# Altium PCB SC8808_V4.PcbDoc (part 2 of 2)
Units mm, origin at the board's own origin, x right, y up, seen from the top; angles counter-clockwise.
Board outline 67.41 x 100 mm, 4 copper layers (Top Layer, SIGNAL, POWER, Bottom Layer), stack 1.439 mm thick; 136 components, 98 nets, 352 pads, 959 vias.
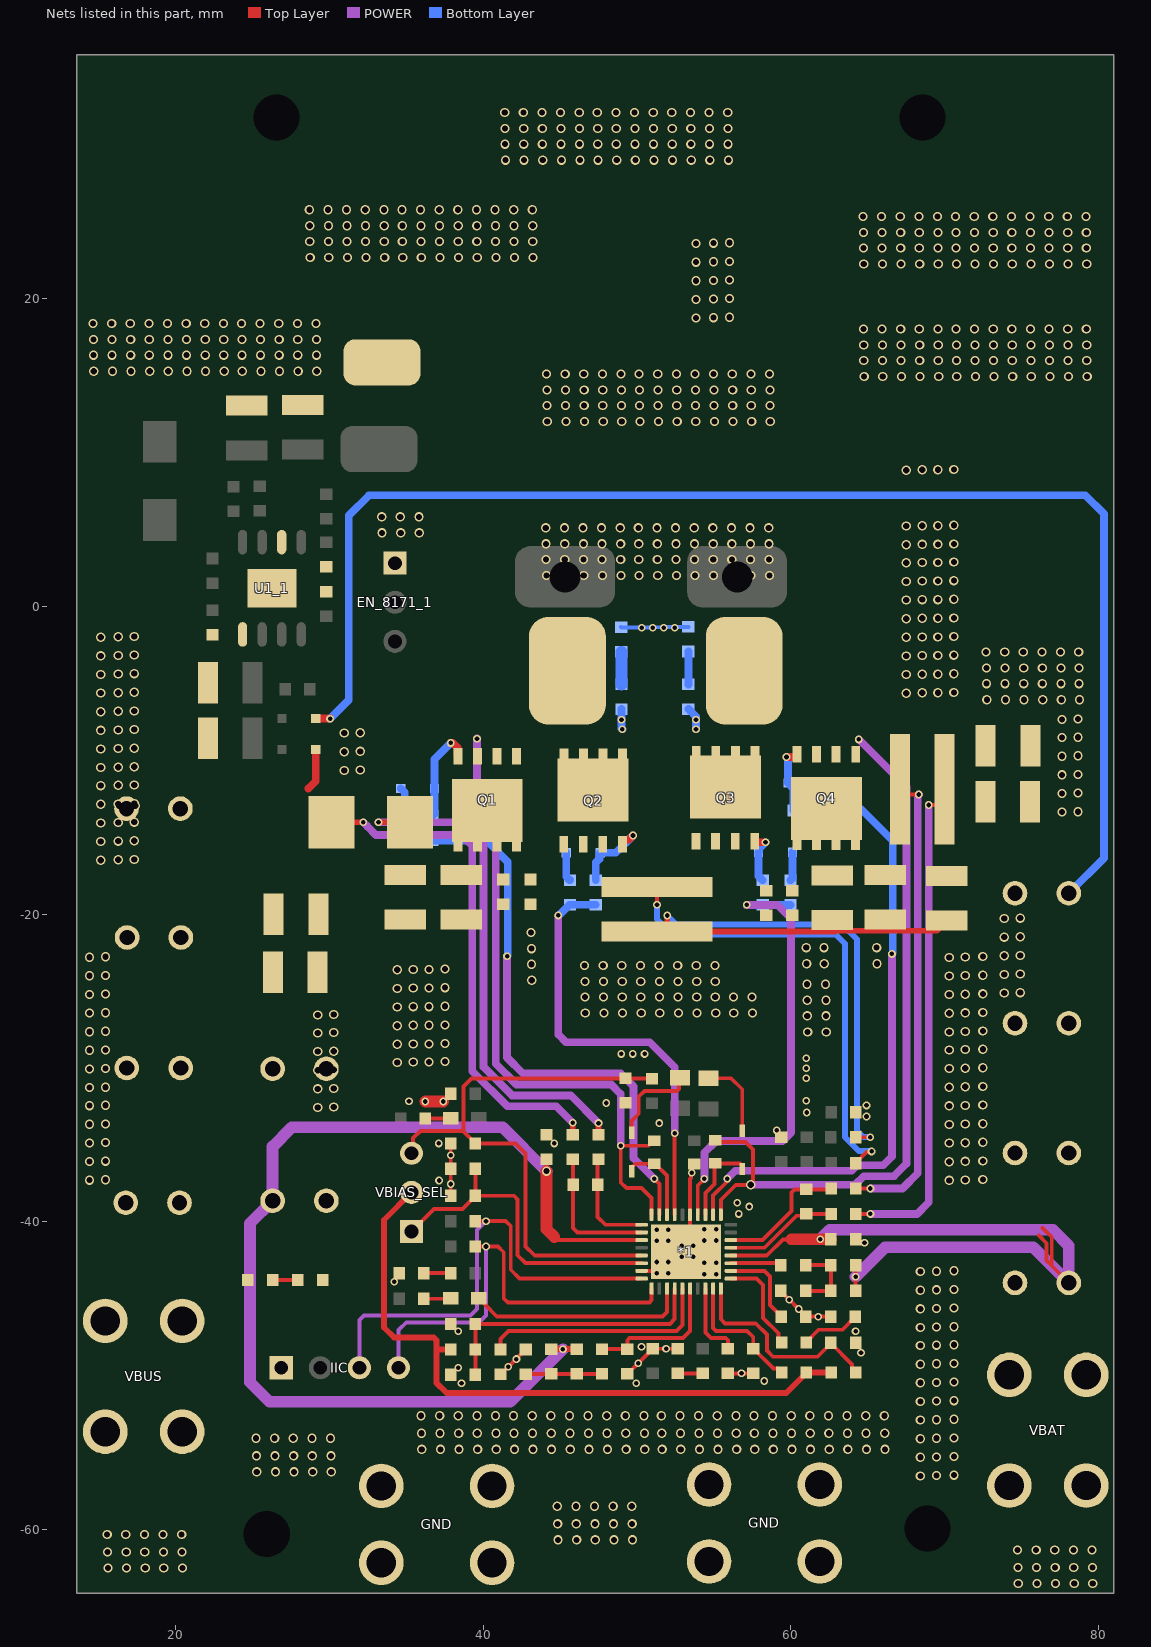
[diagram p4: the nets of this part, all layers, seen from the top]

## Via types
v1: diameter 0.6, hole 0.4, Top Layer to Bottom Layer, 853 vias
v2: diameter 0.5, hole 0.3, Top Layer to Bottom Layer, 106 vias

## Nets (pads, with @x,y where several pads share a name; then routed paths per layer and width w, separated by ;. In a path a pad name is that pad's centre, name@x,y a point inside that pad or via, vN(x,y) a via of type N, cw(c..) or ccw(c..) an arc to the next point about the centre after c; other vN are vias at no path point) (continued)
GND: *1.23 *1.35 *1.37 C1.2 C4.1 C5.2 C6.2 C7.1 C8.2 C9.2 C10.2 C11.2 C12.1 C13.1 C14.1 C15.1 C16.1 C17.2 C18.1 C19.2 C20.1 C27.1 C28.1 C29.2 C43.1 C44.1 C45.2 C46.2 C53.1 C60.2 C71.1 C72.1 C73.2 C75.1 C77.1 C78.2 C79.1 C80.2 C81.1 C82.1 C84.2 C85.1 C86_2.1 C88_1.1 C89_1.1 C90_1.1 C91_1.1 C92.1 EN_8171_1.1 GND.1 IIC.1 pad.2@33.426,15.875 R9.1 R10.1 R13.1 R14.2 R18.2 R23.1 R33_1.1 R35.1 R38.2 R41.1 R45.1 R51.2 R53.2 R54_1.1 U1_1.1 U1_1.6 U1_1.9 | length 75.1
  Top Layer w0.254: C78.2@37.885,-34.9 37.891,-34.906 v2(37.891,-35.662) v2(37.891,-37.541) 37.891,-38.297 C92.1@37.897,-38.303 ; C79.1@41.123,-49.898 41.148,-49.898 v2(41.623,-49.423) 41.642,-49.423 42.145,-48.92 v2(42.164,-48.92) ; v2@42.145,-48.901 42.499,-48.546 42.526,-48.546 R9.1@42.774,-48.298 ; C19.2@49.378,-49.873 49.403,-49.873 v2(50.079,-49.196) 50.756,-48.52 50.756,-48.495 51.004,-48.247 C4.1@51.029,-48.247 v2(51.892,-48.247) R53.2@52.654,-48.247 ; *1.35@50.302,-43.186 51.123,-43.186 v2(51.283,-43.345) ; v2(53.67,-41.542) 53.452,-41.324 *1.23@53.452,-39.536 53.452,-37.207 53.522,-37.138 53.522,-36.852 v2(53.569,-36.805) 53.569,-36.367 C80.2@53.702,-36.233 ; C82.1@55.905,-49.847 v2(56.794,-49.847) R13.1@57.556,-49.847 ; R18.2@59.36,-44.488 59.36,-44.513 59.893,-45.046 v2(59.893,-45.06) 59.9,-45.06 60.504,-45.664 v2(60.511,-45.664) 60.737,-45.891 60.737,-45.916 C81.1@60.985,-46.164 v2(61.786,-46.164) R51.2@62.586,-46.164 ; R14.2@64.211,-34.506 64.216,-34.501 v2(65.171,-34.501)
  Top Layer w0.381: R10.1@51.3,-21.118 R10.1@51.661,-21.118 ; v2(51.968,-20.084) 51.968,-20.811 R10.1@51.661,-21.118 ; C53.1@70.146,-20.413 69.486,-21.073 62.947,-21.073 62.902,-21.118 R10.1@51.661,-21.118
  Top Layer w0.762: v2(36.246,-32.174) v2(37.414,-32.174)
  Bottom Layer w0.254: C85.1@48.971,-1.33 48.992,-1.351 50.297,-1.351 v2(50.317,-1.372) 50.33,-1.359 51.016,-1.359 51.029,-1.346 51.74,-1.346 51.752,-1.333 52.438,-1.333 52.451,-1.321 C71.1@53.34,-1.321
  Bottom Layer w0.381: v2(51.968,-20.084) 52.56,-20.676 63.348,-20.676 64.299,-21.627 64.299,-34.056 64.72,-34.478 65.148,-34.478 v2(65.171,-34.501)
  other v1: 74.79,-63.517 76.001,-63.517 77.212,-63.517 78.423,-63.517 79.634,-63.517 15.608,-62.501 16.819,-62.501 18.03,-62.501 19.241,-62.501 20.452,-62.501 74.765,-62.476 75.976,-62.476 77.186,-62.476 78.397,-62.476 79.608,-62.476 15.583,-61.46 16.794,-61.46 18.004,-61.46 19.215,-61.46 20.426,-61.46 74.739,-61.333 75.95,-61.333 77.161,-61.333 78.372,-61.333 79.583,-61.333 44.869,-60.672 46.08,-60.672 47.291,-60.672 48.502,-60.672 49.713,-60.672 15.557,-60.317 16.768,-60.317 17.979,-60.317 19.19,-60.317 20.401,-60.317 44.843,-59.631 46.054,-59.631 47.265,-59.631 48.476,-59.631 49.687,-59.631 44.818,-58.488 46.029,-58.488 47.24,-58.488 48.451,-58.488 49.662,-58.488 68.422,-56.518 69.464,-56.493 70.607,-56.468 25.285,-56.253 26.496,-56.253 27.707,-56.253 28.918,-56.253 30.129,-56.253 68.422,-55.307 69.464,-55.282 70.607,-55.257 25.26,-55.211 26.471,-55.211 27.682,-55.211 28.893,-55.211 30.104,-55.211 36.011,-54.788 37.222,-54.788 38.433,-54.788 39.644,-54.788 40.855,-54.788 42.03,-54.788 43.241,-54.788 44.452,-54.788 45.663,-54.788 46.874,-54.788 48.085,-54.788 49.296,-54.788 50.507,-54.788 51.636,-54.788 52.847,-54.788 54.058,-54.788 55.269,-54.788 56.48,-54.788 57.655,-54.788 58.866,-54.788 60.077,-54.788 61.288,-54.788 62.499,-54.788 63.71,-54.788 64.921,-54.788 66.132,-54.788 68.422,-54.096 25.235,-54.068 26.446,-54.068 27.656,-54.068 28.867,-54.068 30.078,-54.068 69.464,-54.071 70.607,-54.046 35.986,-53.746 37.197,-53.746 38.408,-53.746 39.619,-53.746 40.829,-53.746 42.005,-53.746 43.216,-53.746 44.427,-53.746 45.638,-53.746 46.849,-53.746 48.06,-53.746 49.271,-53.746 50.481,-53.746 51.611,-53.746 52.822,-53.746 54.033,-53.746 55.244,-53.746 56.455,-53.746 57.63,-53.746 58.841,-53.746 60.052,-53.746 61.263,-53.746 62.474,-53.746 63.685,-53.746 64.896,-53.746 66.107,-53.746 68.422,-52.886 69.464,-52.86 70.607,-52.835 35.96,-52.603 37.171,-52.603 38.382,-52.603 39.593,-52.603 40.804,-52.603 41.98,-52.603 43.19,-52.603 44.401,-52.603 45.612,-52.603 46.823,-52.603 48.034,-52.603 49.245,-52.603 50.456,-52.603 51.585,-52.603 52.796,-52.603 54.007,-52.603 55.218,-52.603 56.429,-52.603 57.605,-52.603 58.816,-52.603 60.027,-52.603 61.237,-52.603 62.448,-52.603 63.659,-52.603 64.87,-52.603 66.081,-52.603 68.422,-51.675 69.464,-51.649 70.607,-51.624 68.422,-50.464 69.464,-50.438 70.607,-50.413 68.422,-49.253 69.464,-49.227 70.607,-49.202 68.422,-48.042 69.464,-48.016 70.607,-47.991 68.422,-46.866 69.464,-46.841 70.607,-46.816 68.422,-45.655 69.464,-45.63 70.607,-45.605 68.422,-44.444 69.464,-44.419 70.607,-44.394 68.422,-43.234 69.464,-43.208 70.607,-43.183 70.302,-37.301 14.402,-37.29 71.343,-37.276 15.443,-37.264 72.486,-37.25 70.302,-36.09 14.402,-36.079 71.343,-36.065 15.443,-36.053 72.486,-36.039 14.402,-34.868 70.302,-34.879 15.443,-34.842 71.343,-34.854 72.486,-34.829 70.302,-33.668 14.402,-33.657 71.343,-33.643 15.443,-33.631 72.486,-33.618 29.247,-32.563 30.288,-32.537 70.302,-32.457 14.402,-32.446 71.343,-32.432 15.443,-32.42 72.486,-32.407 29.247,-31.352 30.288,-31.326 14.402,-31.27 15.443,-31.245 70.302,-31.247 71.343,-31.221 72.486,-31.196 29.247,-30.141 30.288,-30.115 14.402,-30.059 70.302,-30.036 15.443,-30.034 71.343,-30.01 72.486,-29.985 34.417,-29.632 35.458,-29.607 36.474,-29.607 37.516,-29.582 29.247,-28.93 30.288,-28.904 14.402,-28.848 15.443,-28.823 70.302,-28.825 71.343,-28.799 72.486,-28.774 34.417,-28.457 35.458,-28.431 36.474,-28.431 37.516,-28.406 29.247,-27.719 30.288,-27.694 61.096,-27.649 62.307,-27.649 70.302,-27.649 14.402,-27.638 71.343,-27.624 15.443,-27.612 72.486,-27.598 34.417,-27.246 35.458,-27.221 36.474,-27.221 37.516,-27.195 61.07,-26.608 62.281,-26.608 29.247,-26.543 30.288,-26.518 46.642,-26.43 47.853,-26.43 49.064,-26.43 50.275,-26.43 51.486,-26.43 52.697,-26.43 53.907,-26.43 55.118,-26.43 56.294,-26.43 57.505,-26.43 70.302,-26.438 14.402,-26.427 71.343,-26.413 15.443,-26.401 72.486,-26.387 34.417,-26.035 35.458,-26.01 36.474,-26.01 37.516,-25.984 61.07,-25.592 62.281,-25.592 46.617,-25.388 47.827,-25.388 49.038,-25.388 50.249,-25.388 51.46,-25.388 52.671,-25.388 53.882,-25.388 55.093,-25.388 56.269,-25.388 57.479,-25.388 14.402,-25.216 70.302,-25.227 15.443,-25.19 71.343,-25.202 72.486,-25.177 73.876,-25.125 74.918,-25.099 34.417,-24.824 35.458,-24.799 36.474,-24.799 37.516,-24.773 61.045,-24.55 62.256,-24.55 46.617,-24.372 47.827,-24.372 49.038,-24.372 50.249,-24.372 51.46,-24.372 52.671,-24.372 53.882,-24.372 55.093,-24.372 43.162,-24.296 70.302,-24.016 14.402,-24.005 71.343,-23.991 15.443,-23.979 72.486,-23.966 73.876,-23.914 74.918,-23.888 34.417,-23.613 35.458,-23.588 36.474,-23.588 37.516,-23.562 46.591,-23.331 47.802,-23.331 49.013,-23.331 50.224,-23.331 51.435,-23.331 52.646,-23.331 53.857,-23.331 55.068,-23.331 43.137,-23.255 61.032,-23.216 62.176,-23.216 65.608,-23.216 70.302,-22.805 14.402,-22.794 71.343,-22.78 15.443,-22.768 72.486,-22.755 73.876,-22.703 74.918,-22.677 43.137,-22.239 61.006,-22.174 62.15,-22.174 65.583,-22.174 73.876,-21.492 74.918,-21.466 43.111,-21.197 73.876,-20.281 74.918,-20.255 15.138,-16.487 16.281,-16.462 17.323,-16.436 15.138,-15.276 16.281,-15.251 17.323,-15.225 15.138,-14.065 16.281,-14.04 17.323,-14.014 77.63,-13.36 78.672,-13.335 16.339,-12.971 17.38,-12.946 15.138,-12.854 16.281,-12.829 17.323,-12.803 77.63,-12.149 78.672,-12.124 15.138,-11.643 16.281,-11.618 17.323,-11.592 77.63,-10.939 78.672,-10.913 30.97,-10.648 32.012,-10.623 15.138,-10.468 16.281,-10.442 17.323,-10.417 77.63,-9.728 78.672,-9.702 30.97,-9.437 32.012,-9.412 15.138,-9.257 16.281,-9.231 17.323,-9.206 77.63,-8.517 78.672,-8.491 30.97,-8.226 32.012,-8.201 15.138,-8.046 16.281,-8.02 17.323,-7.995 77.63,-7.341 78.672,-7.316 15.138,-6.835 16.281,-6.81 17.323,-6.784 72.746,-6.053 73.957,-6.053 75.167,-6.053 76.378,-6.053 77.589,-6.053 78.765,-6.053 67.502,-5.631 15.138,-5.624 68.543,-5.606 69.559,-5.606 16.281,-5.599 70.6,-5.58 17.323,-5.573 72.72,-5.012 73.931,-5.012 75.142,-5.012 76.353,-5.012 77.564,-5.012 78.739,-5.012 15.138,-4.413 67.502,-4.42 16.281,-4.388 68.543,-4.395 69.559,-4.395 17.323,-4.362 70.6,-4.37 72.72,-3.996 73.931,-3.996 75.142,-3.996 76.353,-3.996 77.564,-3.996 78.739,-3.996 15.138,-3.202 67.502,-3.209 16.281,-3.177 68.543,-3.184 69.559,-3.184 17.323,-3.151 70.6,-3.159 72.695,-2.954 73.906,-2.954 75.117,-2.954 76.328,-2.954 77.539,-2.954 78.714,-2.954 67.502,-1.998 15.138,-1.991 68.543,-1.973 69.559,-1.973 16.281,-1.966 70.6,-1.948 17.323,-1.94 67.502,-0.788 68.543,-0.762 69.559,-0.762 70.6,-0.737 67.502,0.423 68.543,0.449 69.559,0.449 70.6,0.474 67.502,1.634 68.543,1.66 69.559,1.66 70.6,1.685 44.12,2.02 45.331,2.02 46.542,2.02 47.753,2.02 48.964,2.02 50.139,2.02 51.35,2.02 52.561,2.02 53.772,2.02 54.983,2.02 56.194,2.02 57.405,2.02 58.616,2.02 67.502,2.845 68.543,2.871 69.559,2.871 70.6,2.896 44.095,3.062 45.305,3.062 46.516,3.062 47.727,3.062 48.938,3.062 50.114,3.062 51.325,3.062 52.536,3.062 53.747,3.062 54.957,3.062 56.168,3.062 57.379,3.062 58.59,3.062 67.502,4.021 68.543,4.046 69.559,4.046 70.6,4.072 44.095,4.078 45.305,4.078 46.516,4.078 47.727,4.078 48.938,4.078 50.114,4.078 51.325,4.078 52.536,4.078 53.747,4.078 54.957,4.078 56.168,4.078 57.379,4.078 58.59,4.078 33.429,4.793 34.64,4.793 35.85,4.793 44.069,5.119 45.28,5.119 46.491,5.119 47.702,5.119 48.913,5.119 50.088,5.119 51.299,5.119 52.51,5.119 53.721,5.119 54.932,5.119 56.143,5.119 57.354,5.119 58.565,5.119 67.502,5.232 68.543,5.257 69.559,5.257 70.6,5.282 33.403,5.834 34.614,5.834 35.825,5.834 67.502,8.864 68.543,8.89 69.559,8.89 70.6,8.915 44.171,12.028 45.382,12.028 46.593,12.028 47.804,12.028 49.014,12.028 50.19,12.028 51.401,12.028 52.612,12.028 53.823,12.028 55.034,12.028 56.245,12.028 57.456,12.028 58.666,12.028 44.145,13.069 45.356,13.069 46.567,13.069 47.778,13.069 48.989,13.069 50.165,13.069 51.376,13.069 52.586,13.069 53.797,13.069 55.008,13.069 56.219,13.069 57.43,13.069 58.641,13.069 44.145,14.085 45.356,14.085 46.567,14.085 47.778,14.085 48.989,14.085 50.165,14.085 51.376,14.085 52.586,14.085 53.797,14.085 55.008,14.085 56.219,14.085 57.43,14.085 58.641,14.085 64.77,14.949 65.981,14.949 67.192,14.949 68.403,14.949 69.614,14.949 70.789,14.949 72,14.949 73.211,14.949 74.422,14.949 75.633,14.949 76.844,14.949 78.055,14.949 79.266,14.949 44.12,15.127 45.331,15.127 46.542,15.127 47.753,15.127 48.964,15.127 50.139,15.127 51.35,15.127 52.561,15.127 53.772,15.127 54.983,15.127 56.194,15.127 57.405,15.127 58.616,15.127 14.689,15.302 15.9,15.302 17.111,15.302 18.322,15.302 19.532,15.302 20.743,15.302 21.954,15.302 23.165,15.302 24.341,15.302 25.552,15.302 26.763,15.302 27.974,15.302 29.184,15.302 64.745,15.99 65.956,15.99 67.167,15.99 68.378,15.99 69.588,15.99 70.764,15.99 71.975,15.99 73.186,15.99 74.397,15.99 75.608,15.99 76.819,15.99 78.03,15.99 79.24,15.99 14.663,16.344 15.874,16.344 17.085,16.344 18.296,16.344 19.507,16.344 20.718,16.344 21.929,16.344 23.14,16.344 24.315,16.344 25.526,16.344 26.737,16.344 27.948,16.344 29.159,16.344 64.745,17.006 65.956,17.006 67.167,17.006 68.378,17.006 69.588,17.006 70.764,17.006 71.975,17.006 73.186,17.006 74.397,17.006 75.608,17.006 76.819,17.006 78.03,17.006 79.24,17.006 14.663,17.36 15.874,17.36 17.085,17.36 18.296,17.36 19.507,17.36 20.718,17.36 21.929,17.36 23.14,17.36 24.315,17.36 25.526,17.36 26.737,17.36 27.948,17.36 29.159,17.36 64.719,18.048 65.93,18.048 67.141,18.048 68.352,18.048 69.563,18.048 70.739,18.048 71.95,18.048 73.16,18.048 74.371,18.048 75.582,18.048 76.793,18.048 78.004,18.048 79.215,18.048 14.638,18.401 15.849,18.401 17.06,18.401 18.271,18.401 19.482,18.401 20.693,18.401 21.903,18.401 23.114,18.401 24.29,18.401 25.501,18.401 26.712,18.401 27.923,18.401 29.134,18.401 53.84,18.758 54.983,18.783 56.024,18.808 53.84,19.969 54.983,19.994 56.024,20.019 53.84,21.179 54.983,21.205 56.024,21.23 64.745,22.264 65.956,22.264 67.167,22.264 68.378,22.264 69.588,22.264 70.764,22.264 71.975,22.264 73.186,22.264 74.397,22.264 75.608,22.264 76.819,22.264 78.03,22.264 79.24,22.264 53.84,22.39 54.983,22.416 56.024,22.441 28.753,22.696 29.964,22.696 31.175,22.696 32.386,22.696 33.597,22.696 34.772,22.696 35.983,22.696 37.194,22.696 38.405,22.696 39.616,22.696 40.827,22.696 42.038,22.696 43.249,22.696 64.719,23.306 65.93,23.306 67.141,23.306 68.352,23.306 69.563,23.306 70.739,23.306 71.95,23.306 73.16,23.306 74.371,23.306 75.582,23.306 76.793,23.306 78.004,23.306 79.215,23.306 53.84,23.601 54.983,23.627 56.024,23.652 28.728,23.737 29.938,23.737 31.149,23.737 32.36,23.737 33.571,23.737 34.747,23.737 35.958,23.737 37.169,23.737 38.38,23.737 39.59,23.737 40.801,23.737 42.012,23.737 43.223,23.737 64.719,24.322 65.93,24.322 67.141,24.322 68.352,24.322 69.563,24.322 70.739,24.322 71.95,24.322 73.16,24.322 74.371,24.322 75.582,24.322 76.793,24.322 78.004,24.322 79.215,24.322 28.728,24.753 29.938,24.753 31.149,24.753 32.36,24.753 33.571,24.753 34.747,24.753 35.958,24.753 37.169,24.753 38.38,24.753 39.59,24.753 40.801,24.753 42.012,24.753 43.223,24.753 64.694,25.363 65.905,25.363 67.116,25.363 68.327,25.363 69.538,25.363 70.713,25.363 71.924,25.363 73.135,25.363 74.346,25.363 75.557,25.363 76.768,25.363 77.979,25.363 79.19,25.363 28.702,25.795 29.913,25.795 31.124,25.795 32.335,25.795 33.546,25.795 34.721,25.795 35.932,25.795 37.143,25.795 38.354,25.795 39.565,25.795 40.776,25.795 41.987,25.795 43.198,25.795 41.453,29.021 42.664,29.021 43.875,29.021 45.086,29.021 46.297,29.021 47.472,29.021 48.683,29.021 49.894,29.021 51.105,29.021 52.316,29.021 53.527,29.021 54.738,29.021 55.949,29.021 41.428,30.062 42.638,30.062 43.849,30.062 45.06,30.062 46.271,30.062 47.447,30.062 48.658,30.062 49.869,30.062 51.08,30.062 52.29,30.062 53.501,30.062 54.712,30.062 55.923,30.062 41.428,31.078 42.638,31.078 43.849,31.078 45.06,31.078 46.271,31.078 47.447,31.078 48.658,31.078 49.869,31.078 51.08,31.078 52.29,31.078 53.501,31.078 54.712,31.078 55.923,31.078 41.402,32.119 42.613,32.119 43.824,32.119 45.035,32.119 46.246,32.119 47.421,32.119 48.632,32.119 49.843,32.119 51.054,32.119 52.265,32.119 53.476,32.119 54.687,32.119 55.898,32.119
  other v2: 38.595,-50.49 49.962,-50.49 58.268,-50.343 38.379,-49.486 64.567,-48.514 50.292,-48.122 38.379,-47.117 64.211,-47.104 34.214,-43.891 54.381,-43.396 55.143,-43.396 52.045,-43.345 54.381,-42.659 55.143,-42.659 51.283,-42.608 52.045,-42.608 52.908,-42.278 53.67,-42.278 52.908,-41.542 64.795,-41.351 51.283,-41.237 52.045,-41.237 54.381,-41.212 55.143,-41.212 51.283,-40.5 52.045,-40.5 54.381,-40.475 55.143,-40.475 56.622,-39.484 57.297,-39.006 56.51,-38.762 37.135,-37.313 37.109,-34.9 44.62,-34.9 59.08,-34.056 51.452,-33.579 64.922,-33.147 61.036,-32.893 64.923,-32.431 47.998,-32.271 35.179,-32.156 61.011,-32.131 61.011,-30.661 61.011,-30.023 61.011,-29.362 48.971,-29.083 49.733,-29.083 50.495,-29.083 51.029,-1.372 51.74,-1.372 52.451,-1.372
HD1: *1.27 R25.1 R58.1 | length 38
  Top Layer w0.254: v2(51.13,-37.206) 51.452,-37.528 *1.27@51.452,-39.536
  POWER w0.508: v2(41.554,-22.733) 41.554,-29.312 42.605,-30.363 48.943,-30.363 49.784,-31.204 49.784,-35.86 v2(51.13,-37.206)
  Bottom Layer w0.508: R58.1@34.902,-15.198 R25.1@36.683,-15.198 40.195,-15.198 41.599,-16.602 41.599,-22.688 v2(41.554,-22.733)
HD2: *1.20 R26.2 R57.2 | length 40.3
  Top Layer w0.254: *1.20@54.952,-39.536 54.952,-38.291 55.866,-37.378 v2(55.866,-37.206)
  POWER w0.508: v2(55.866,-37.206) 56.39,-36.683 63.967,-36.683 64.324,-36.325 66.008,-36.325 66.573,-35.76 v2(66.573,-22.581)
  Bottom Layer w0.508: R26.2@61.773,-13.259 61.832,-13.2 63.417,-13.2 R57.2@63.477,-13.14 64.55,-13.14 66.624,-15.215 66.624,-22.53 v2(66.573,-22.581)
IBAT_MON: *1.12 C81.2 | length 5.6
  Top Layer w0.254: *1.12@56.102,-43.186 58.286,-43.186 58.658,-43.558 58.658,-45.412 59.385,-46.139 C81.2@59.385,-46.164
IBAT_SET: *1.10 R32.1 R35.2 | length 13.7
  Top Layer w0.254: *1.10@55.452,-44.336 55.452,-46.333 55.728,-46.609 57.722,-46.609 58.445,-47.333 58.445,-48.362 58.852,-48.768 61.734,-48.768 R35.2@62.611,-47.891 ; R35.2@62.611,-47.866 R35.2@62.611,-47.891 ; R32.1@64.236,-49.797 63.988,-49.549 63.988,-49.269 R35.2@62.611,-47.891
IBUS_MON: *1.5 C79.2 | length 15.3
  Top Layer w0.254: C79.2@41.123,-48.298 41.123,-47.611 41.643,-47.091 52.578,-47.091 52.952,-46.717 *1.5@52.952,-44.336
IBUS_SET: *1.9 R12.1 R13.2 | length 8.7
  Top Layer w0.254: *1.9@54.952,-44.336 54.952,-46.9 55.143,-47.091 57.15,-47.091 57.556,-47.498 R13.2@57.556,-48.247 57.581,-48.247 58.868,-49.534 59.163,-49.534 59.411,-49.782 R12.1@59.411,-49.797
LD1: *1.25 R27.1 R60.1 | length 28.5
  Top Layer w0.254: *1.25@52.452,-39.536 v2(52.452,-34.241)
  POWER w0.508: v2(44.882,-20.079) 44.882,-27.813 45.39,-28.321 50.825,-28.321 52.452,-29.948 v2(52.452,-34.241)
  Bottom Layer w0.508: v2(44.882,-20.079) 44.92,-20.079 45.619,-19.38 R60.1@45.644,-19.38 R27.1@47.32,-19.38
LD2: *1.22 R28.2 R59.2 | length 30.4
  Top Layer w0.254: *1.22@53.952,-39.536 53.952,-37.635 v2(54.381,-37.206)
  POWER w0.508: v2(54.381,-37.206) 54.381,-35.507 55.143,-34.746 59.463,-34.746 60.02,-34.188 60.02,-20.289 59.124,-19.393 v2(57.137,-19.393)
  Bottom Layer w0.508: v2(57.137,-19.393) R28.2@58.176,-19.393 R59.2@59.979,-19.393
Net*1_3: *1.3 D5.2 | length 14.4
  Top Layer w0.254: D5.2@39.703,-44.971 39.803,-44.971 40.076,-45.244 40.076,-45.344 40.884,-46.152 51.664,-46.152 51.952,-45.863 *1.3@51.952,-44.336
Net*1_21: *1.21 C67.2 D3.2 | length 5.7
  Top Layer w0.254: *1.21@54.452,-39.536 54.452,-38.131 55.043,-37.54 55.043,-36.196 C67.2@55.093,-36.196 56.697,-36.196 56.845,-36.344 D3.2@56.845,-36.569
Net*1_26: *1.26 C66.2 D2.2 | length 5.5
  Top Layer w0.254: D2.2@49.651,-36.702 49.651,-36.477 49.906,-36.221 51.18,-36.221 51.952,-36.993 *1.26@51.952,-39.536
NetC2_2: C2.2 R7.1 R9.2 R63.2 | length 5
  Top Layer w0.254: R9.2@42.774,-49.898 42.786,-49.886 47.714,-49.886 R63.2@47.727,-49.873
NetC3_1: C3.1 R11.1 R18.1 R37.2 | length 5
  Top Layer w0.254: R18.1@60.96,-44.488 C3.1@62.611,-44.488 R37.2@62.611,-42.812 R11.1@60.96,-42.812
NetC71_2: C71.2 R30.1 | length 2.1
  Bottom Layer w0.508: R30.1@53.34,-5.064 C71.2@53.34,-2.921
NetC72_2: C72.2 R31.1 | length 1.6
  Top Layer w0.254: R31.1@26.31,-43.782 C72.2@27.958,-43.782
NetC83_1: C83.1 R53.1 | length 1.6
  Top Layer w0.254: R53.1@52.654,-49.847 C83.1@54.28,-49.847
NetC85_2: C85.2 R29.1 | length 2.2
  Bottom Layer w0.762: C85.2@48.971,-2.93 48.984,-2.93 48.997,-2.942 R29.1@48.997,-5.064
NetC86_2: 
NetC87_2: 
NetD1_1: D1.1 R57.1 | length 1.5
  Bottom Layer w0.508: D1.1@62.026,-11.478 62.058,-11.509 63.445,-11.509 R57.1@63.477,-11.54
NetD2_1: D2.1 R62.2 | length 6.1
  Top Layer w0.254: D2.1@49.651,-34.202 49.651,-33.433 50.114,-32.969 50.114,-31.859 50.477,-31.496 52.611,-31.496 52.726,-31.381 52.726,-30.7 R62.2@52.807,-30.62
NetD3_1: D3.1 R61.2 | length 5.2
  Top Layer w0.254: R61.2@54.635,-30.661 56.125,-30.661 56.845,-31.381 D3.1@56.845,-34.107
NetD4_1: D4.1 R58.2 | length 1.9
  Bottom Layer w0.508: D4.1@34.64,-11.82 34.902,-12.081 R58.2@34.902,-13.598
NetD5_1: D5.1 R19.2 | length 1.8
  Top Layer w0.254: R19.2@36.144,-45.001 37.872,-45.001 D5.1@37.903,-44.971
NetD6_1: D6.1 R22.2 | length 1.7
  Top Layer w0.254: R22.2@36.246,-33.282 37.882,-33.282 D6.1@37.903,-33.261
NetD7_2: D7.2 R59.1 | length 1.9
  Bottom Layer w0.508: R59.1@59.979,-17.793 59.983,-17.793 60.104,-17.672 D7.2@60.104,-15.977
NetD8_2: D8.2 R60.2 | length 1.9
  Bottom Layer w0.508: D8.2@45.407,-16.002 45.407,-17.569 45.619,-17.78 R60.2@45.644,-17.78
NetD9_1: 
NetEN_8171_3: 
NetP1_2: R38.1 R42.2 | length 1.7
  Top Layer w0.254: R38.1@36.144,-43.332 R42.2@37.885,-43.332
NetP1_10: R48.2 R51.1 | length 3.9
  Top Layer w0.254: R48.2@61.011,-47.841 61.011,-47.816 61.811,-47.015 63.36,-47.015 64.186,-46.19 R51.1@64.186,-46.164
NTC: *1.4 R40.2 R41.2 R45.2 | length 18.4
  Top Layer w0.254: R41.2@39.497,-49.935 R40.2@39.497,-48.298 R45.2@39.497,-46.634 52.146,-46.634 52.452,-46.328 *1.4@52.452,-44.336
PG: 
RDT: *1.11 R48.1 | length 6.5
  Top Layer w0.254: *1.11@56.102,-43.686 57.783,-43.686 58.204,-44.107 58.204,-46.241 59.205,-47.241 59.205,-47.635 R48.1@59.411,-47.841
RDT_20ns: 
RDT_35ns: 
RDT_50ns: 
RDT_65ns: 
RDT_80ns: 
RDT_95ns: 
RDT_110ns: 
RON: 
SCL: *1.36 IIC.3 R21.2 | length 31
  Top Layer w0.254: R21.2@39.497,-39.954 v2(40.183,-39.954) 41.466,-39.954 41.792,-40.28 41.792,-43.112 42.365,-43.686 *1.36@50.302,-43.686
  POWER w0.254: IIC.3@31.953,-49.486 31.953,-46.38 32.258,-46.076 39.186,-46.076 39.606,-45.655 39.606,-40.531 v2(40.183,-39.954)
SDA: *1.1 IIC.4 R20.2 | length 28.5
  Top Layer w0.254: R20.2@39.497,-41.605 v2(40.183,-41.605) 40.97,-41.605 41.338,-41.973 41.338,-44.971 41.607,-45.241 50.804,-45.241 50.952,-45.092 *1.1@50.952,-44.336
  POWER w0.254: IIC.4@34.493,-49.486 34.493,-47.041 35.001,-46.533 39.726,-46.533 40.183,-46.076 v2(40.183,-41.605)
SNS1N: *1.29 C30.2 R3.1 | length 6.8
  Top Layer w0.254: R3.1@47.498,-35.928 47.447,-35.979 C30.2@47.447,-37.579 47.447,-39.683 47.95,-40.186 *1.29@50.302,-40.186
SNS1P: *1.30 C30.1 R2.1 | length 9
  Top Layer w0.254: R2.1@45.822,-35.928 45.847,-35.954 C30.1@45.847,-37.579 45.847,-40.386 46.147,-40.686 *1.30@50.302,-40.686
SNS2N: *1.15 C63.2 R6.1 | length 7.4
  Top Layer w0.254: *1.15@56.102,-41.686 58.296,-41.686 60.379,-39.603 60.892,-39.603 C63.2@61.011,-39.484 R6.1@62.637,-39.484
SNS2P: *1.16 C63.1 R5.1 | length 8.6
  Top Layer w0.254: *1.16@56.102,-41.186 58.154,-41.186 60.033,-39.306 60.033,-38.1 60.248,-37.884 62.586,-37.884 R5.1@62.637,-37.833
snub_gnd: Q2.1 Q2.2 Q2.3 Q3.1 Q3.2 Q3.3 R8.2 R10.2 | length 31
  Top Layer w0.254: v2(51.3,-19.38) R10.2@51.3,-18.218 ; R8.2@64.237,-36.182 64.237,-36.157 64.927,-35.467 65.206,-35.467 v2(65.253,-35.42)
  Bottom Layer w0.381: v2(51.3,-19.38) 51.3,-20.322 52.314,-21.336 62.941,-21.336 63.525,-21.92 63.525,-34.495 64.431,-35.4 65.233,-35.4 v2(65.253,-35.42)
snub_vout: C13.2 C14.2 C43.2 C44.2 Q4.5 Q4.6 Q4.7 Q4.8 R4.1 R5.2 | length 30.5
  Top Layer w0.254: R5.2@64.237,-37.833 v2(65.176,-37.833) ; R4.1@67.096,-11.88 67.434,-12.217 v2(68.326,-12.217)
  POWER w0.508: v2(65.176,-37.833) 67.26,-37.833 68.258,-36.835 68.258,-12.285 v2(68.326,-12.217)
SS: *1.8 C82.2 | length 5.1
  Top Layer w0.254: *1.8@54.452,-44.336 54.452,-47.188 54.81,-47.545 55.757,-47.545 55.905,-47.694 C82.2@55.905,-48.247
SW: 
SW1: *1.28 C66.1 L2.0@45.472,-4.166 Q1.1 Q1.2 Q1.3 Q2.5 Q2.6 Q2.7 Q2.8 R29.2 | length 43.5
  Top Layer w0.254: *1.28@50.952,-39.536 50.952,-38.458 50.302,-37.808 49.315,-37.808 48.948,-37.442 v2(48.948,-35.052) 50.749,-35.052 51.08,-34.721 C66.1@51.13,-34.721
  POWER w0.508: v2(39.599,-8.585) 39.599,-13.402 40.818,-14.621 40.818,-29.722 42.166,-31.071 48.325,-31.071 48.948,-31.694 v2(48.948,-35.052)
  Bottom Layer w0.508: R29.2@48.997,-6.664 48.997,-7.92 v2(49.052,-7.976)
  other v2: 48.997,-7.35
SW2: *1.19 C67.1 L2.0@56.972,-4.166 Q3.5 Q3.6 Q3.7 Q3.8 Q4.1 Q4.2 Q4.3 R30.2 | length 49.5
  Top Layer w0.254: C67.1@55.093,-34.696 55.193,-34.796 57.046,-34.796 57.545,-35.295 57.545,-37.443 v1(57.396,-37.592) 56.421,-37.592 55.452,-38.561 *1.19@55.452,-39.536
  POWER w0.508: v1(57.396,-37.592) 64.18,-37.592 64.738,-37.033 66.7,-37.033 67.513,-36.22 67.513,-11.722 v2(64.427,-8.636)
  Bottom Layer w0.508: R30.2@53.34,-6.664 53.365,-6.664 53.486,-6.785 53.486,-6.81 53.84,-7.164 v2(53.84,-7.976)
  other v2: 53.84,-7.35
SYNC: 
VBAT: *1.14 C3.2 C5.1 C8.1 C12.2 C20.2 C45.1 C46.1 C53.2 C60.1 D11_1.1 R4.2 R6.2 R37.1 VBAT.1 | length 173.5
  Top Layer w0.254: *1.14@56.102,-42.186 58.438,-42.186 59.488,-41.135 60.033,-41.135 ; C12.2@62.611,-41.135 C12.2@62.611,-41.11 ; C3.2@64.211,-44.488 v2(64.211,-43.574) R37.1@64.211,-42.812 64.211,-42.787 64.459,-42.539 R37.1@64.484,-42.539 ; R6.2@64.237,-39.484 v2(65.176,-39.484) ; v2(68.966,-12.903) 69.473,-12.903 69.996,-12.38 R4.2@69.996,-11.88 ; 76.136,-40.894 76.632,-41.39 76.632,-42.522 76.962,-42.852 ; 76.375,-40.408 76.962,-40.996 76.962,-42.852 ; C60.1@78.077,-43.967 76.962,-42.852
  Top Layer w0.508: D11_1.1@29.116,-7.284 30.042,-7.284 v2(30.048,-7.29)
  Top Layer w0.762: 60.033,-41.135 v2(61.925,-41.135) C12.2@62.611,-41.135
  POWER w0.508: v2(65.176,-39.484) 68.212,-39.484 68.966,-38.73 v2(68.966,-12.903)
  POWER w0.762: v2(61.925,-41.135) 62.54,-40.52 77.045,-40.52 78.077,-41.552 C60.1@78.077,-43.967 75.766,-41.656 66.129,-41.656 v2(64.211,-43.574)
  Bottom Layer w0.508: v2(30.048,-7.29) 31.267,-6.071 31.267,5.918 32.588,7.239 79.146,7.239 80.371,6.015 80.371,-16.35 C8.1@78.077,-18.644
VBAT_24V: 
VBAT_48V: 
VBAT_57V6: 
VBAT_58V8: 
VBAT_FB: *1.13 R11.2 | length 3.3
  Top Layer w0.254: *1.13@56.102,-42.686 59.234,-42.686 R11.2@59.36,-42.812
VBIAS: R12.2 R32.2 R40.1 VBIAS_SEL.2 | length 43.5
  Top Layer w0.381: VBIAS_SEL.2@35.344,-38.082 33.553,-39.873 33.553,-46.863 34.214,-47.523 36.786,-47.523 36.957,-47.695 36.957,-48.279 ; R40.1@37.897,-48.298 36.976,-48.298 36.957,-48.279 ; R32.2@62.636,-49.797 R12.2@61.011,-49.797 61.011,-49.822 59.702,-51.13 37.632,-51.13 36.957,-50.455 36.957,-48.279
VBUS: *1.31 C1.1 C2.1 C6.1 C7.2 C9.1 C10.1 C11.1 C29.1 C73.1 C84.1 D10_1.1 R1.1 R2.2 R7.2 R31.2 VBUS.1 | length 106.2
  Top Layer w0.254: v1(44.12,-36.703) C11.1@44.12,-35.928 ; 44.62,-41.186 *1.31@50.302,-41.186
  Top Layer w0.381: R1.1@30.14,-14.021 v2(32.209,-14.021) ; R7.2@44.425,-48.273 v2(45.187,-48.273) C2.1@46.076,-48.273 ; R2.2@45.822,-34.328 v2(45.822,-33.553)
  Top Layer w0.508: 28.626,-11.836 29.116,-11.346 D10_1.1@29.116,-9.296
  Top Layer w0.762: v1(44.12,-36.703) 44.12,-40.477 44.62,-40.978
  POWER w0.508: v2(32.209,-14.021) 32.488,-14.299 32.488,-14.314 33.033,-14.859 38.608,-14.859 39.294,-15.545 39.294,-30.201 41.58,-32.487 44.755,-32.487 v2(45.822,-33.553)
  POWER w0.762: v1(44.12,-36.703) 41.275,-33.858 27.558,-33.858 26.31,-35.107 C84.1@26.31,-38.633 24.841,-40.101 24.841,-50.419 26.111,-51.689 41.77,-51.689 v2(45.187,-48.273)
VBUS_FB: *1.6 C19.1 R63.1 | length 9.3
  Top Layer w0.254: R63.1@47.727,-48.273 C19.1@49.378,-48.273 49.378,-47.694 49.526,-47.545 52.998,-47.545 53.452,-47.091 *1.6@53.452,-44.336
VCC: *1.33 C75.2 C78.1 R124.1 VBIAS_SEL.3 | length 38.4
  Top Layer w0.254: VBIAS_SEL.3@35.344,-35.542 35.442,-35.444 35.442,-34.56 35.916,-34.087 38.697,-34.087 ; *1.33@50.302,-42.186 43.354,-42.186 42.761,-41.592 42.761,-35.547 42.113,-34.9 C78.1@39.485,-34.9 39.485,-34.875 38.697,-34.087 ; R124.1@50.978,-30.683 50.971,-30.677 49.257,-30.677 C75.2@49.251,-30.671 39.256,-30.671 38.73,-31.197 38.73,-34.054 38.697,-34.087
VDD: *1.34 C77.2 C92.2 VBIAS_SEL.1 | length 21.6
  Top Layer w0.254: VBIAS_SEL.1@35.344,-40.622 36.799,-39.167 38.659,-39.167 39.497,-38.328 C92.2@39.497,-38.303 ; C77.2@39.497,-36.551 C92.2@39.497,-38.303 ; *1.34@50.302,-42.686 42.761,-42.686 42.246,-42.171 42.246,-38.55 41.998,-38.303 C92.2@39.497,-38.303
Vg_Q1: D4.2 Q1.4 R25.2 | length 6.4
  Top Layer w0.508: v2(37.897,-8.865) 38.025,-8.865 38.323,-9.162 38.323,-9.686 Q1.4@38.359,-9.722
  Bottom Layer w0.508: R25.2@36.683,-13.598 36.708,-13.598 36.829,-13.477 36.829,-13.452 36.84,-13.441 D4.2@36.84,-11.82 36.84,-9.922 v2(37.897,-8.865)
Vg_Q2: D8.1 Q2.4 R27.2 | length 5.6
  Top Layer w0.508: Q2.4@49.047,-15.443 49.047,-15.193 49.083,-15.157 49.469,-15.157 v2(49.742,-14.884)
  Bottom Layer w0.508: R27.2@47.32,-17.78 47.32,-16.643 47.561,-16.402 47.561,-16.048 D8.1@47.607,-16.002 48.625,-16.002 v2(49.742,-14.884)
Vg_Q3: D7.1 Q3.4 R28.1 | length 3.5
  Top Layer w0.508: Q3.4@57.658,-15.264 57.658,-15.289 57.694,-15.325 v2(58.353,-15.325)
  Bottom Layer w0.508: R28.1@58.176,-17.793 58.151,-17.793 58.03,-17.672 58.03,-17.647 57.904,-17.521 D7.1@57.904,-15.977 57.95,-15.931 57.95,-15.727 v2(58.353,-15.325)
Vg_Q4: D1.2 Q4.4 R26.1 | length 4.5
  Top Layer w0.508: v2(59.717,-9.779) 60.376,-9.779 60.412,-9.743 Q4.4@60.412,-9.611
  Bottom Layer w0.508: v2(59.717,-9.779) 59.826,-9.888 D1.2@59.826,-11.478 60.173,-11.824 R26.1@60.173,-13.259
VIN_8171: 
VMID: C15.2 C16.2 C27.2 C28.2 Q1.5 Q1.6 Q1.7 Q1.8 R1.2 R3.2 | length 33.9
  Top Layer w0.381: v2(33.196,-14.021) R1.2@35.24,-14.021 ; R3.2@47.498,-34.328 v2(47.498,-33.579)
  POWER w0.508: v2(33.196,-14.021) 38.913,-14.021 40.03,-15.138 40.03,-29.936 41.873,-31.779 45.698,-31.779 v2(47.498,-33.579)
pads on no net: C86_2.2 C87_1.1 C87_1.2 Designator1.2 Designator5.2 Designator6.2 Designator7.2 L1.0 R15_1.1 R17_1.1 R23_2.1 R33_1.2 R54_1.2 U1_1.4 U1_1.5 U1_1.7
copper on no net: | length 11.4
  Top Layer w0.254: 22.403,-0.229 22.403,1.524 ; 23.774,7.798 23.787,7.81 25.463,7.81 25.476,7.823 ; 25.476,6.223 25.633,6.066 25.633,4.188 ; 28.173,-1.812 29.557,-1.812 29.82,-1.549 29.82,-0.66 29.794,-0.635 ; 28.173,4.188 28.176,4.191 29.794,4.191 29.794,5.715

## Polygon pours and split planes (outlines as drawn)
VBUS on Top Layer "VBUS_L01_P000" (solid, pour order 0): 13.818,-55.22 14.376,-55.778 21.946,-55.778 23.089,-54.635 23.089,-45.773 27.874,-40.988 27.874,-18.542 31.623,-14.793 31.623,-11.836 31.267,-11.481 19.99,-11.481 18.593,-12.878 18.593,-39.894 13.818,-44.669 13.818,-48.438
SW1 on Top Layer "SW1_L01_P002" (solid, remove dead copper, pour order 2): 39.218,-1.041 39.218,-10.16 39.446,-10.389 43.759,-10.389 44.542,-11.172 44.542,-13.834 44.755,-14.046 49.486,-14.046 49.784,-13.748 49.784,-0.66 49.098,0.025 40.284,0.025
SW2 on Top Layer "SW2_L01_P005" (solid, remove dead copper, pour order 5): 53.238,-4.699 53.238,-13.741 53.543,-14.046 57.999,-14.046 58.353,-13.692 58.353,-9.262 58.979,-8.636 60.731,-8.636 61.239,-9.144 61.239,-10.16 61.341,-10.262 64.719,-10.262 64.973,-10.008 64.973,-0.787 64.186,0 54.661,0 53.213,-1.448
snub_vout on Top Layer "SNUB_VOUT_L01_P006" (solid, remove dead copper, pour order 6): 59.717,-11.477 59.717,-15.492 57.779,-17.431 57.779,-18.779 57.999,-18.999 64.567,-18.999 67.132,-18.999 67.843,-18.288 67.843,-15.494 67.843,-7.772 67.513,-7.442 65.735,-7.442 65.303,-7.874 65.303,-10.668 65.138,-10.833 60.058,-10.833 59.715,-11.176
VBAT on Top Layer "VBAT_L01_P007" (solid, remove dead copper, pour order 7): 69.317,-16.713 68.732,-17.297 68.732,-18.771 68.961,-18.999 72.136,-18.999 73.787,-17.348 75.59,-17.348 75.971,-17.729 75.971,-44.755 72.39,-48.336 72.39,-57.683 73.508,-58.801 80.416,-58.801 80.874,-58.344 80.874,-15.215 80.289,-14.63 74.698,-14.63 74.117,-14.05 74.117,-8.026 73.431,-7.341 69.723,-7.341 69.317,-7.747
snub_gnd on Top Layer "SNUB_GND_L01_P008" (solid, remove dead copper, pour order 8): 44.542,-18.406 45.11,-18.974 56.058,-18.974 56.845,-18.186 56.845,-14.859 56.667,-14.681 51.333,-14.681 49.733,-16.281 48.412,-16.281 48.133,-16.002 48.133,-14.884 48.031,-14.783 44.695,-14.783 44.542,-14.935
1 on Top Layer "1_L01_P009" (solid, remove dead copper, pour order 9): 25.021,-2.97 24.206,-3.785 24.206,-10.287 27.626,-10.287 27.766,-10.146 27.766,-4.955 26.075,-3.263 26.075,-1.081 25.806,-0.813 25.237,-0.813 25.021,-1.029
3 on Top Layer "3_L01_P010" (solid, remove dead copper, pour order 10): 17.297,3.607 18.288,2.616 24.042,2.616 24.714,3.289 24.714,6.198 24.206,6.706 21.463,6.706 20.633,7.535 17.746,7.535 17.297,7.087
4 on Top Layer "4_L01_P011" (solid, remove dead copper, pour order 11): 16.461,9.284 17.041,8.704 35.681,8.704 35.968,8.992 35.968,11.379 35.688,11.659 22.252,11.659 20.829,13.081 16.867,13.081 16.461,12.675
VMID on Top Layer "VMID_L01_P025" (solid, remove dead copper, pour order 25): 33.6,-12.421 33.6,-16.074 33.325,-16.35 33.325,-18.415 33.6,-18.691 43.417,-18.691 43.842,-18.265 43.842,-12.321 42.693,-11.172 34.37,-11.172 33.604,-11.938
GND on Top Layer "GND_L01_P034" (solid, remove dead copper, pour order 34): 13.589,-64.135 13.589,35.865 81.001,35.865 81.001,-64.135
GND on Bottom Layer "GND_L04_P037" (solid, pour order 37): 13.589,-64.135 13.589,35.865 81.001,35.865 81.001,-64.135
GND on POWER "GND_L03_P036" (solid, remove dead copper, pour order 36): 13.589,-64.135 13.589,35.865 81.001,35.865 81.001,-64.135
GND on SIGNAL "GND_L02_P035" (solid, pour order 35): 13.589,-64.135 13.589,35.865 81.001,35.865 81.001,-64.135

## Other copper
Top Layer:
  pour cut-out: 44.628,-35.357 45.51,-34.475 45.51,-34.241 45.96,-33.791 49.53,-33.791 49.53,-39.503 48.443,-39.503 44.62,-39.503
  pour cut-out: 64.008,-39.929 63.302,-40.635 62.637,-40.635
  pour cut-out: 60.274,-33.744 60.274,-36.652 65.913,-36.652 65.913,-33.744
  pour cut-out: 48.082,-19.38 48.082,-20.443 53.904,-20.443 53.925,-20.422 53.925,-19.147 48.086,-19.147 48.082,-19.152
  pour cut-out: 46.101,-19.126 43.307,-19.126 43.155,-18.974
  pour cut-out: 31.623,-11.557 31.623,-15.704 31.94,-16.021 33.527,-16.021 33.6,-15.947 33.6,-11.934 33.223,-11.557 31.852,-11.557
  pour cut-out: 49.835,-1.905 53.162,-1.905 53.213,-1.956 49.886,-1.956
  pour cut-out: 37.719,-45.441 39.704,-45.441 39.834,-45.571
  pour cut-out: 49.53,-42.926 49.53,-43.51 49.555,-43.51 49.555,-42.926
  pour cut-out: 33.782,-34.9 33.782,-51.41 65.38,-51.41 65.38,-32.131 64.473,-31.224 35.552,-31.224 33.782,-32.995 33.782,-34.9 33.426,-34.9 33.426,-32.766 35.281,-30.912 64.821,-30.912 65.913,-32.004 65.913,-51.867 33.426,-51.867 33.426,-51.511 33.426,-34.9
  pour cut-out: 55.575,-19.177 58.879,-19.177 58.938,-19.118
  pour cut-out: 66.624,-19.304 70.213,-19.304 70.302,-19.215
  pour cut-out: 66.624,-7.442 66.813,-7.254 70.434,-7.254
POWER:
  pour cut-out: 64.618,-34.37 64.618,-35.767 64.77,-35.92 65.481,-35.92 65.583,-35.818 65.583,-34.362 65.388,-34.167 64.821,-34.167
  pour cut-out: 33.782,-34.9 33.782,-51.41 65.38,-51.41 65.38,-32.131 65.024,-31.775 35.001,-31.775 33.782,-32.995 33.782,-34.9 33.426,-34.9 33.426,-32.766 34.798,-31.394 65.303,-31.394 65.913,-32.004 65.913,-51.867 33.426,-51.867 33.426,-51.511 33.426,-34.9
  pour cut-out: 50.876,-19.253 50.876,-19.482 51.816,-20.422 52.146,-20.422 52.4,-20.168 52.4,-19.939 51.435,-18.974 51.156,-18.974
SIGNAL:
  pour cut-out: 33.782,-34.9 33.782,-51.41 65.38,-51.41 65.38,-32.131 65.024,-31.775 35.001,-31.775 33.782,-32.995 33.782,-34.9 33.426,-34.9 33.426,-32.766 34.798,-31.394 65.303,-31.394 65.913,-32.004 65.913,-51.867 33.426,-51.867 33.426,-51.511 33.426,-34.9
  pour cut-out: 64.719,-34.265 64.719,-35.662 64.872,-35.814 65.583,-35.814 65.684,-35.712 65.684,-34.256 65.49,-34.061 64.922,-34.061
  pour cut-out: 50.876,-19.253 50.876,-19.482 51.816,-20.422 52.146,-20.422 52.4,-20.168 52.4,-19.939 51.435,-18.974 51.156,-18.974
Bottom Layer:
  rectangle net GND: 43.663,-52.984 44.094,-50.368
  rectangle net GND: 44.396,-52.984 44.828,-50.368
  rectangle net GND: 45.129,-52.984 45.561,-50.368
  rectangle net GND: 45.862,-52.984 46.294,-50.368
  rectangle net GND: 46.595,-52.984 47.027,-50.368
  rectangle net GND: 47.329,-52.984 47.76,-50.368
  rectangle net GND: 48.062,-52.984 48.494,-50.368
  rectangle net GND: 48.795,-52.984 49.227,-50.368
  rectangle net GND: 49.528,-52.984 49.96,-50.368
  rectangle net GND: 50.262,-52.984 50.693,-50.368
  rectangle net GND: 50.995,-52.984 51.427,-50.368
  rectangle net GND: 51.728,-52.984 52.16,-50.368
  rectangle net GND: 52.461,-52.984 52.893,-50.368
  rectangle net GND: 53.194,-52.984 53.626,-50.368
  rectangle net GND: 53.928,-52.984 54.359,-50.368
  rectangle net GND: 54.661,-52.984 55.093,-50.368
  pour cut-out: 33.782,-34.9 33.782,-51.41 65.38,-51.41 65.38,-32.131 65.024,-31.775 35.001,-31.775 33.782,-32.995 33.782,-34.9 33.426,-34.9 33.426,-32.766 34.798,-31.394 65.303,-31.394 65.913,-32.004 65.913,-51.867 33.426,-51.867 33.426,-51.511 33.426,-34.9
  pour cut-out: 50.8,-20.32 52.248,-21.768 62.789,-21.768 63.17,-22.149 63.17,-34.722 64.338,-35.89 65.557,-35.89 65.735,-35.712 65.735,-34.183 65.608,-34.056 64.892,-34.056 64.592,-33.757 64.592,-21.336 63.678,-20.422 52.897,-20.422 51.968,-19.493 51.968,-18.974 51.794,-18.799 50.975,-18.799 50.8,-18.974

## Silkscreen, mask and mechanical layers (free items; w line width, h text height)
Top Overlay:
  lines w0.254: 72.06,-53.772 72.06,-53.746
  text "2024/8/8" at 18.521,25.344 h1.2 r90
  text "JYT_Jason" at 15.553,24.532 h1.2 r90
  text "-" at 30.327,15.469 h0.76 r90
  text "+" at 33.757,7.747 h0.76 r90
  text "-" at 31.547,-3.683 h0.76 r90
  text "+" at 31.661,-9.619 h0.76 r90
  text "-" at 26.619,-52.705 h0.76
  text "+" at 29.286,-52.73 h0.76
  text "SDA" at 34.9,-53.213 h0.76 r90
  text "SCL" at 32.334,-53.289 h0.76 r90
  text "VBUS" at 14.106,-57.612 h1.2
  text "VBAT" at 75.738,-61.066 h1.2
  text "GND" at 42.997,-63.302 h1.2
  text "GND" at 49.297,-63.302 h1.2
Mechanical 1:
  the board outline again, w0.254